# Altium PCB WPT Round 2.1 TX Layout.PcbDoc
Units mm, origin at the board's own origin, x right, y up, seen from the top; angles counter-clockwise.
Board outline 93.25 x 80 mm, 4 copper layers (Top Layer, Ground 1, Ground 2, Bottom Layer), stack 0.603 mm thick; 95 components, 39 nets, 228 pads, 190 vias.
Unrouted connection lines stored in the file: 4.
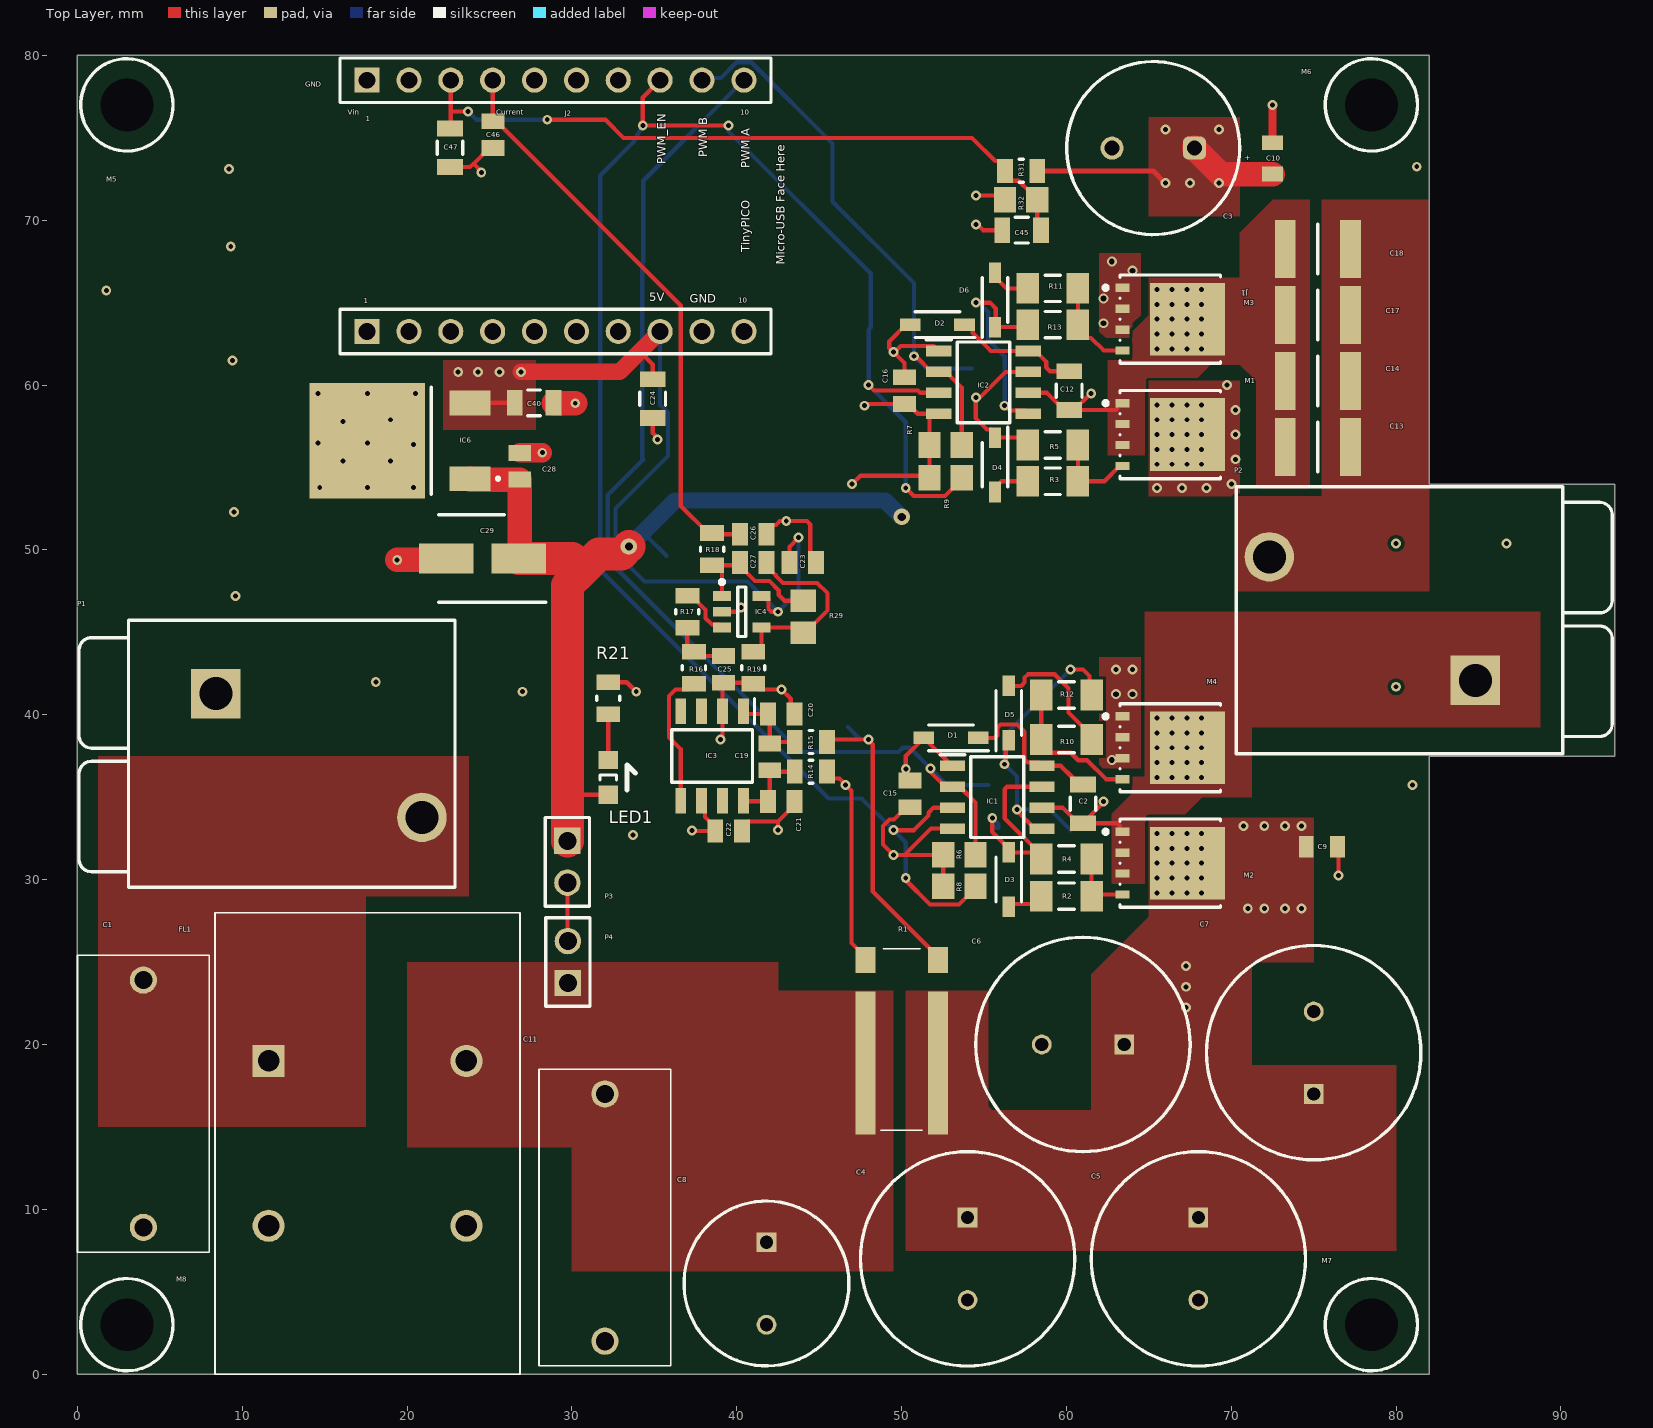
[diagram p0: Top Layer view]
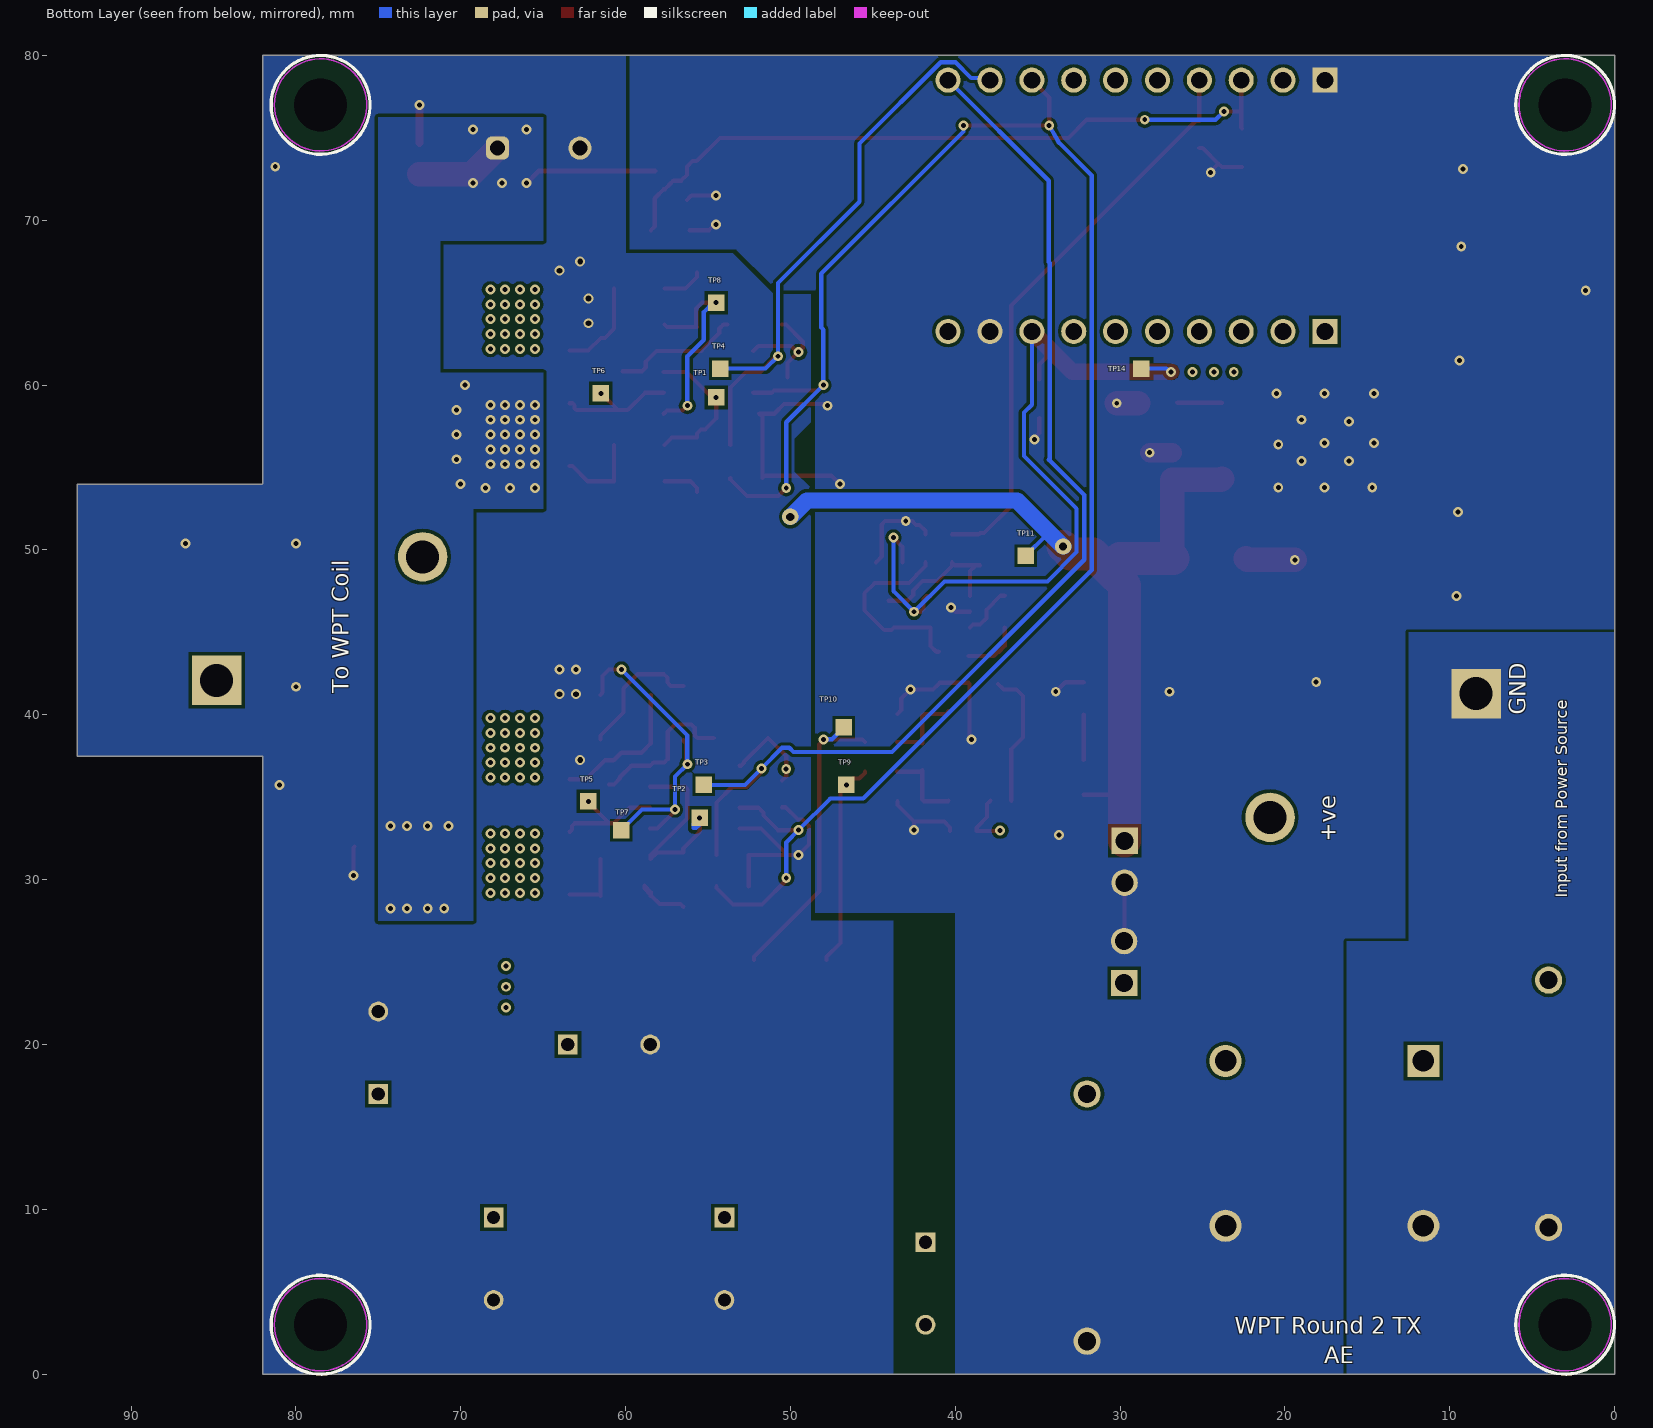
[diagram p1: Bottom Layer view, seen from below]
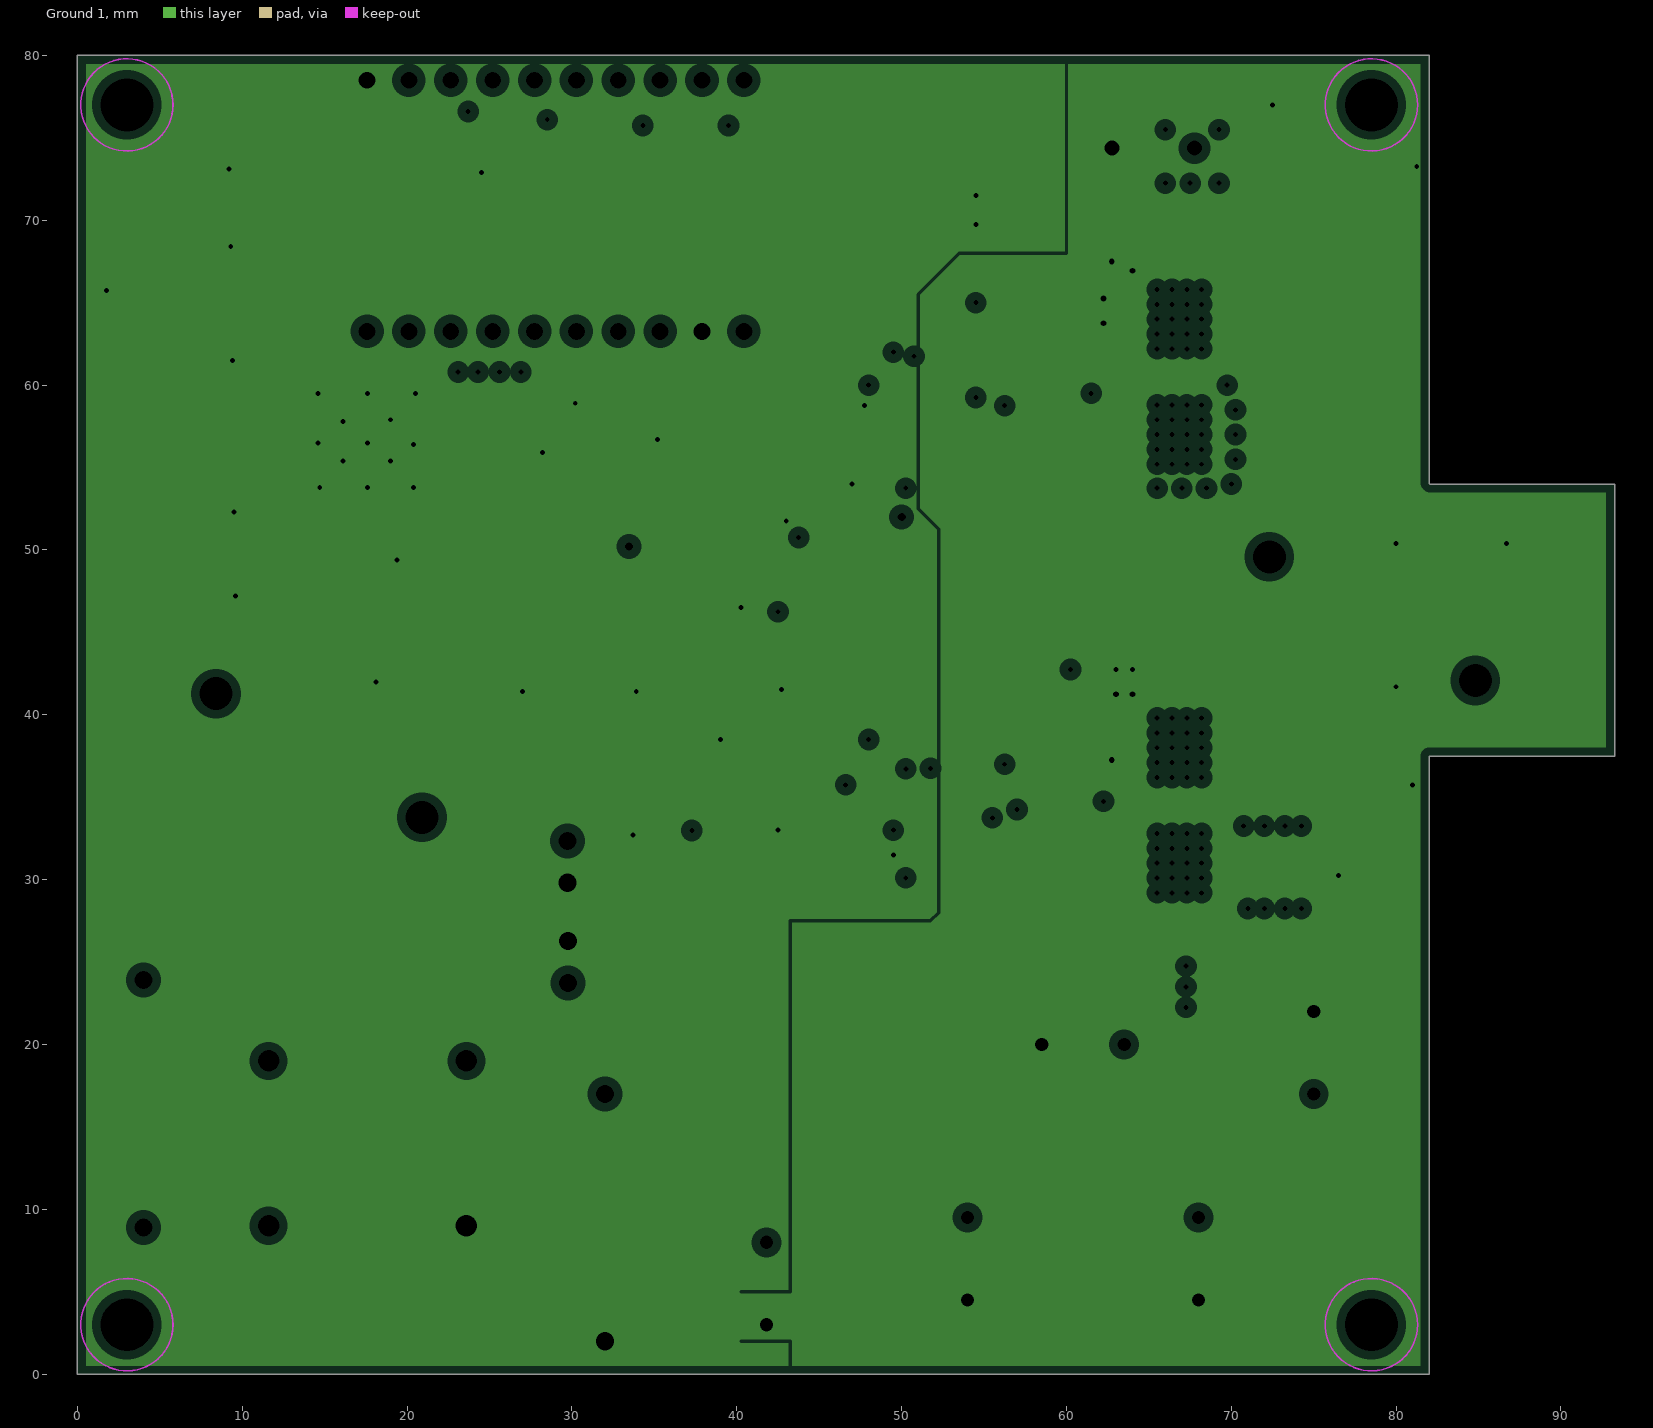
[diagram p2: Ground 1, clearances drawn from the general rule]
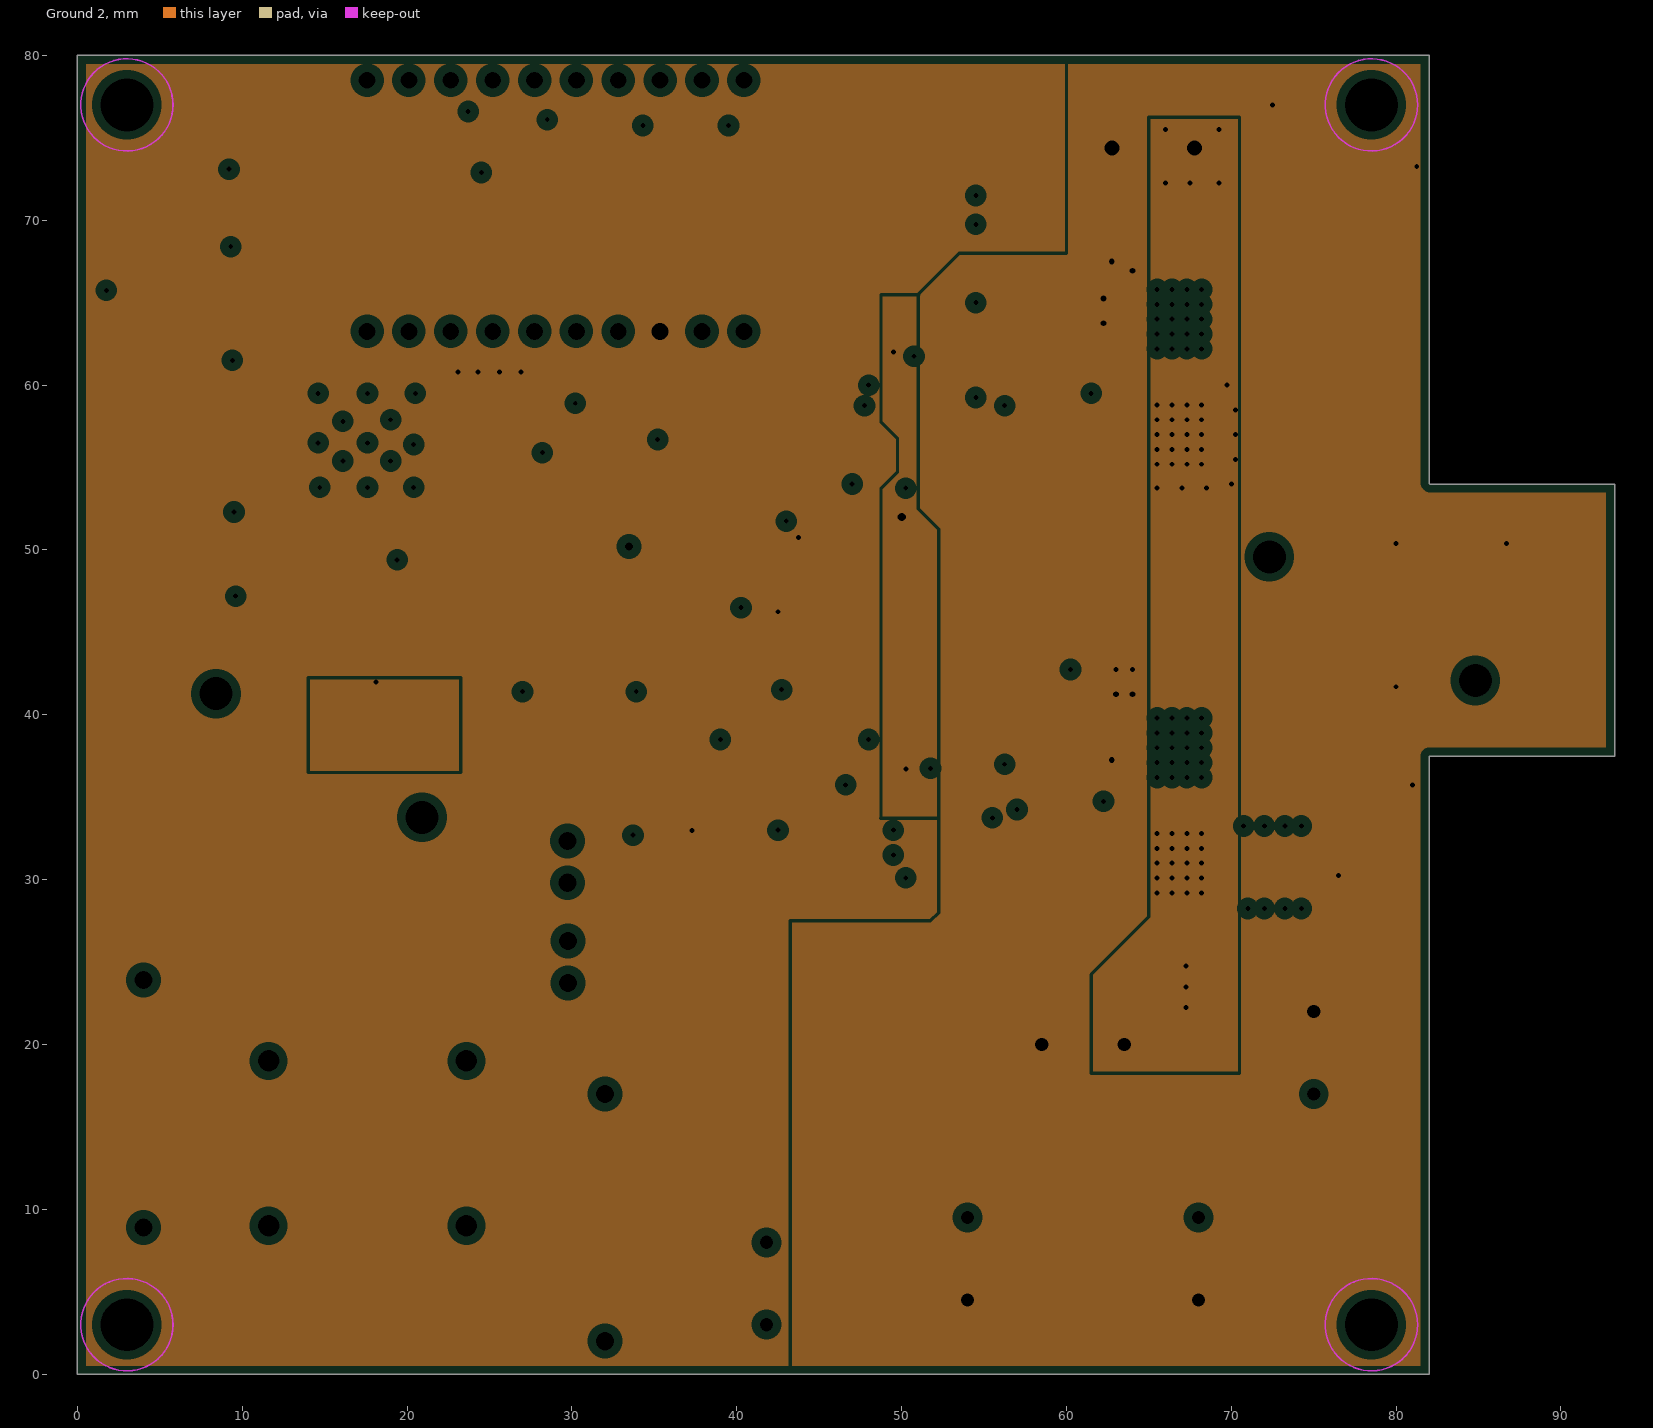
[diagram p3: Ground 2, clearances drawn from the general rule]
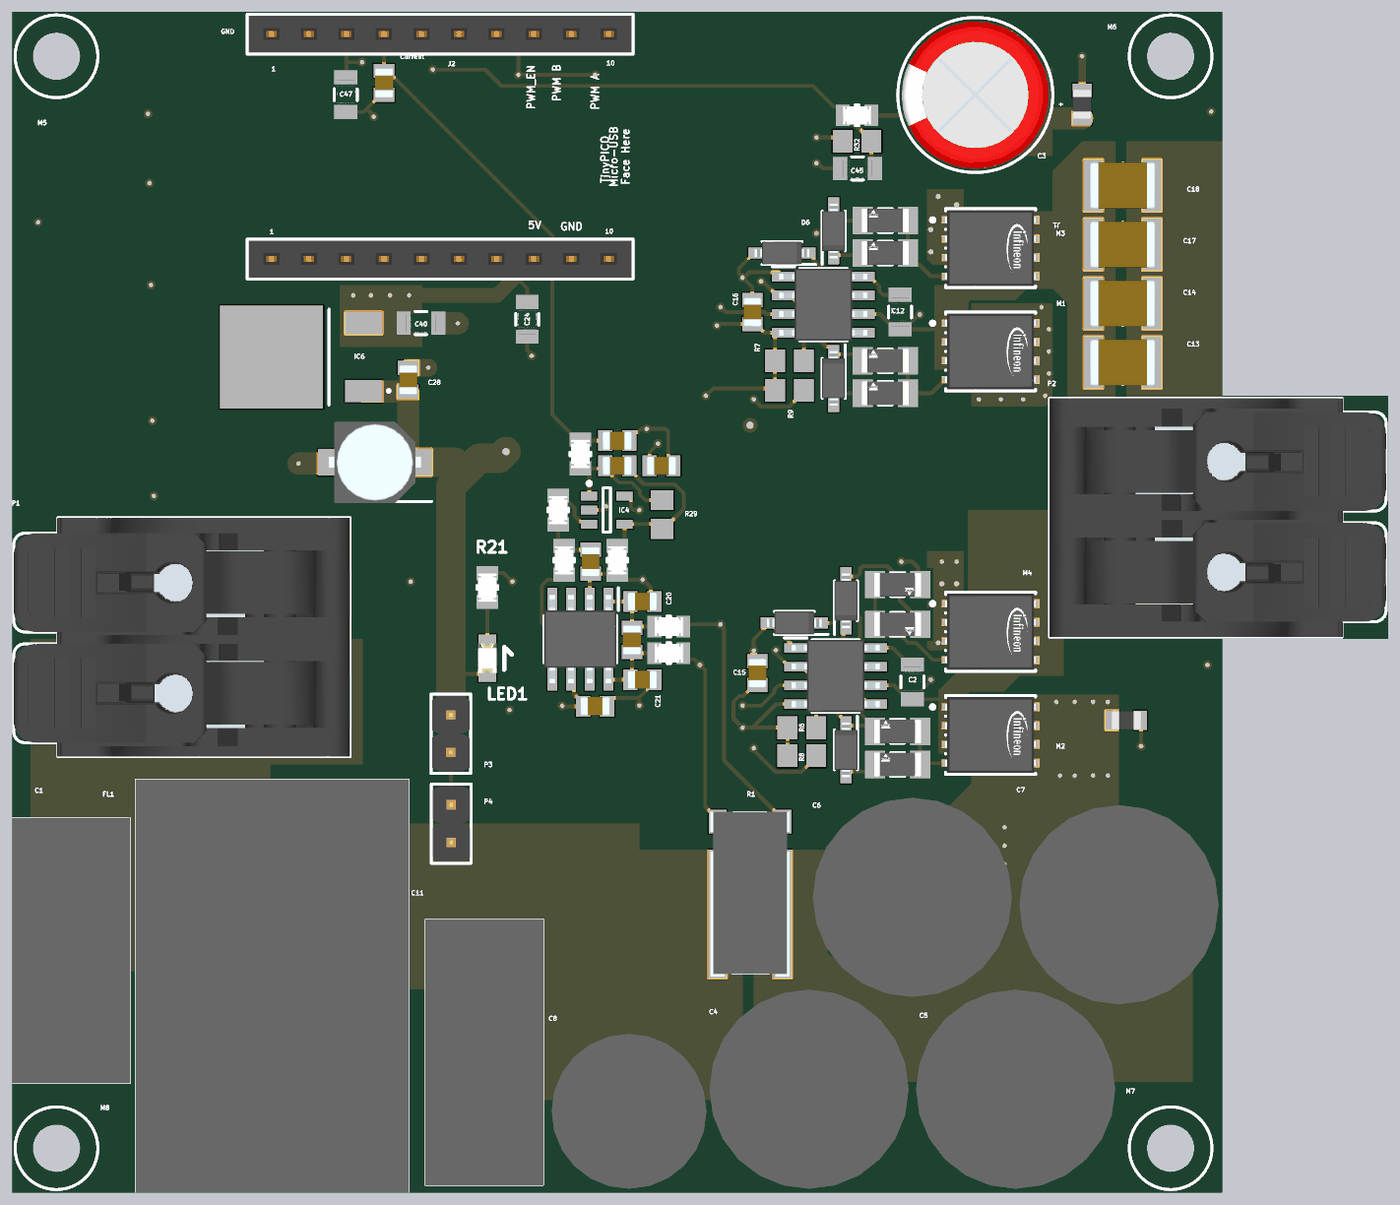
[diagram p4: 3D render of the assembled board from above, using the file's embedded part models]

## Layer stack, top to bottom
Top Solder: solder mask 0.0102, Solder Resist, Dk 3.5
Top Layer: signal copper 0.0356
Dielectric 2: prepreg 0.0711, PP-006, Dk 4.1
Ground 1: plane copper 0.035, net GND
Dielectric 1: dielectric 0.32, FR-4, Dk 4.8
Ground 2: plane copper 0.035, net (Multiple Nets)
Dielectric 3: prepreg 0.0711, PP-006, Dk 4.1
Bottom Layer: signal copper 0.0356
Bottom Solder: solder mask 0.0102, Solder Resist, Dk 3.5

## Board outline
82,54.045 82.045,54 93.25,54 93.25,37.5 82,37.5 82,0 0,0 0,80 82,80

## Design rules (kind name [scope] priority, off if disabled: settings)
Clearance [All] p1: gap=0.2 ignorepadtopadclearanceinfootprint=TRUE
Height [All] p1: minheight=-30 maxheight=50 prefheight=12.7
HoleSize [All] p1: absolutevalues=TRUE maxlimit=30 minlimit=0.025 maxpercent=80.000 minpercent=20.000
MinimumSolderMaskSliver [All] p1: minsoldermaskwidth=0.1
PlaneClearance [All] p1: clearance=0.508
PlaneConnect [All] p1: planeconnectstyle=Direct reliefexpansion=0.508 reliefentries=4 reliefconductorwidth=0.254 reliefairgap=0.254
PolygonConnect [All] p1: connectstyle=Direct reliefconductorwidth=0.254 reliefentries=4 polygonreliefangle="90 Angle" airgapwidth=0.254
RoutingVias [All] p1: holewidth=0.3 width=0.6 viastyle="Through Hole" minholewidth=0.3 minwidth=0.6 maxholewidth=0.711 maxwidth=1.27
SilkToSilkClearance [All] p1: silktosilkclearance=0
SilkToSolderMaskClearance [IsPad] p1: minsilkscreentomaskgap=0.1 clearancetoexposedcopper=TRUE
SolderMaskExpansion [All] p1: expansion=0.102 istentingtop=FALSE
Width "Power Input" [InNetClass('Power')] p1: maxlimit=10 minlimit=0.254 preferedwidth=1
Width "General Width" [All] p2: maxlimit=10 minlimit=0.254 preferedwidth=0.254
23 further rules are at their usual default settings.

## Components (designator, comment, footprint, x,y, rotation, side; value= is the part's Value field where it differs from the comment)
C1 "470nF/275V" 890324025039CS 4,8.904 r90 top
C2 "100nF/50V" "0805 Capacitor" 61,34.6 r90 top
C3 "220uF/63V" WCAP-ATUL_D10H16 65.266,74.379 r0 top
C4 "1000uF/50V" CAPPRD500W62D1300H2650 54,9.5 r270 top
C5 "1000uF/50V" CAPPRD500W62D1300H2650 68,9.5 r270 top
C6 "1000uF/50V" CAPPRD500W62D1300H2650 63.5,20 r180 top
C7 "1000uF/50V" CAPPRD500W62D1300H2650 75,17 r90 top
C8 "220uF/63VDC" CAPPRD500W62D1000H2650 41.8,8 r270 top
C9 "100nF, 100V" WCAP-CSGP_0805_H=1.25mm 75.5,32 r180 top
C10 "100nF, 100V" WCAP-CSGP_0805_H=1.25mm 72.5,73.75 r270 top
C11 "470nF/275V" 890324025039CS 32,2 r90 top
C12 "100nF/50V" "0805 Capacitor" 60.167,59.668 r90 top
C13 "100nF/250V" CAPC4532X220N 75.25,56.25 r180 top
C14 "100nF/250V" CAPC4532X220N 75.25,60.25 r180 top
C15 "1uF/50V" CAPC2012X135N 50.5,35.2 r90 top
C16 "1uF/50V" CAPC2012X135N 50.167,59.668 r90 top
C17 "100nF/250V" CAPC4532X220N 75.25,64.25 r180 top
C18 "100nF/250V" CAPC4532X220N 75.25,68.25 r180 top
C19 "1nF/50V" CAPC2012X90N 42,37.45 r270 top
C20 "1nF/50V" CAPC2012X90N 42.7,40.05 r180 top
C21 "1nF/50V" CAPC2012X90N 42.7,34.75 r180 top
C22 "100nF/50V" CAPC2012X90N 39.5,32.95 r180 top
C23 "100nF/50V" CAPC2012X90N 44,49.25 r180 top
C24 "10nF/50V" "0805 Capacitor" 34.9,59.178 r90 top
C25 "1nF/50V" CAPC2012X90N 39.2,42.75 r90 top
C26 "1nF/50V" CAPC2012X90N 41,50.95 r180 top
C27 "33pF/50V" CAPC2012X90N 41,49.25 r180 top
C28 "100nF/50V" CAPC2012X90N 26.835,55.075 r90 top
C29 "10uF/25V" CAPAE530X550N 24.575,49.484 r180 top
C40 "2.2uF/25V" "0805 Capacitor" 27.7,58.925 r0 top
C45 "10nF/50V" "0805 Capacitor" 57.284,69.4 r0 top
C46 "1nF/50V" CAPC2012X90N 25.2,75.2 r90 top
C47 "10nF/50V" "0805 Capacitor" 22.6,74.4 r90 top
D1 "Diode" SOD3716X135N 53,38.6 r180 top
D2 "Diode" SOD3716X135N 52.167,63.668 r180 top
D3 "Diode" SOD3716X135N 56.5,30 r270 top
D4 "Diode" SOD3716X135N 55.667,55.168 r270 top
D5 "Diode" SOD3716X135N 56.5,40.1 r90 top
D6 "Diode" SOD3716X135N 55.667,65.168 r90 top
FL1 "2 x 220uH 12A" 744844221 11.6,19 r270 top
IC1 "Gate Drive IC for TX" SOIC127P600X175-8N 55.8,35 r0 top
IC2 "Gate Drive IC for TX" SOIC127P600X175-8N 54.967,60.168 r0 top
IC3 "Amplifier" SOIC127P600X175-8N 38.5,37.5 r270 top
IC4 "Op-Amp" ADI-RJ-5_N 40.3,46.25 r0 top
IC6 "5V LDO Regulator" ROHM_TO-252-3 15.972,56.614 r90 top
J1 "61301011821" 61301011821 29,63.26 r0 top
J2 "61301011821" 61301011821 29,78.5 r0 top
LED1 "Green LED" 0805_A 32.2,36.2 r270 top
M1 "Mosfet" FP-PG-TDSON-8-MFG 66.3,57 r270 top
M2 "Mosfet" FP-PG-TDSON-8-MFG 66.3,31 r270 top
M3 "Mosfet" FP-PG-TDSON-8-MFG 66.3,64 r270 top
M4 "Mosfet" FP-PG-TDSON-8-MFG 66.3,38 r270 top
M5 "M3 Mounting Hole" "M3 HOLE" 3,77 r0 top
M6 "M3 Mounting Hole" "M3 HOLE" 78.5,77 r0 top
M7 "M3 Mounting Hole" "M3 HOLE" 78.5,3 r0 top
M8 "M3 Mounting Hole" "M3 HOLE" 3,3 r0 top
P1 "Power In" 691404910002B 11.5,37.629 r270 top
P2 "To Coil" 691404910002B 81.704,45.736 r90 top
P3 "61300211121" 61300211121 29.724,31.084 r270 top
P4 "61300211121" 61300211121 29.75,25 r90 top
R1 "0R005 5W" FC4L110R005FER 50,22 r0 top
R2 "4.7Ohm" FP-CRCW1206-e3-IPC_A 60,29 r180 top
R3 "4.7Ohm" FP-CRCW1206-e3-IPC_A 59.167,54.168 r180 top
R4 "10R" FP-CRCW1206-e3-IPC_A 60,31.25 r180 top
R5 "10R" FP-CRCW1206-e3-IPC_A 59.167,56.368 r180 top
R6 "10K" "0805 Resistor" 53.5,31.5 r0 top
R7 "10K" "0805 Resistor" 52.667,56.368 r0 top
R8 "10K" "0805 Resistor" 53.5,29.6 r0 top
R9 "10K" "0805 Resistor" 52.667,54.368 r0 top
R10 "4.7Ohm" FP-CRCW1206-e3-IPC_A 60,38.5 r0 top
R11 "4.7Ohm" FP-CRCW1206-e3-IPC_A 59.167,65.868 r180 top
R12 "10R" FP-CRCW1206-e3-IPC_A 60,41.2 r0 top
R13 "10R" FP-CRCW1206-e3-IPC_A 59.167,63.668 r180 top
R14 "470R" FP-CRCW0805-e3-MFG 44.5,36.55 r0 top
R15 "470R" FP-CRCW0805-e3-MFG 44.5,38.35 r0 top
R16 "1KR" FP-CRCW0805-e3-MFG 37.4,42.85 r270 top
R17 "6K8R" FP-CRCW0805-e3-MFG 37,46.25 r270 top
R18 "100R" FP-CRCW0805-e3-MFG 38.5,50.05 r270 top
R19 "10KR" FP-CRCW0805-e3-MFG 41,42.85 r270 top
R21 "1K0O" FP-CRCW0805-e3-MFG 32.2,41 r90 top
R29 "15K" "0805 Resistor" 44.044,45.946 r90 top
R31 "1M ohm" FP-CRCW0805-e3-MFG 57.25,73 r0 top
R32 "56K" "0805 Resistor" 57.25,71.239 r0 top
TP1 "TP" "Test Point" 54.5,59.25 r180 bottom
TP2 "TP" "Test Point" 55.5,33.75 r180 bottom
TP3 "TP" "Test Point" 55.25,35.75 r180 bottom
TP4 "TP" "Test Point" 54.25,61 r180 bottom
TP5 "TP" "Test Point" 62.25,34.75 r180 bottom
TP6 "TP" "Test Point" 61.5,59.5 r180 bottom
TP7 "TP" "Test Point" 60.25,33 r180 bottom
TP8 "TP" "Test Point" 54.5,65 r180 bottom
TP9 "TP" "Test Point" 46.601,35.75 r180 bottom
TP10 "TP" "Test Point" 46.75,39.25 r90 bottom
TP11 "TP" "Test Point" 35.725,49.65 r180 bottom
TP14 "TP" "Test Point" 28.7,61 r90 bottom

## Footprints (in the part's own frame and the unit in brackets; to place one, negate y for a bottom-side part, rotate by r counter-clockwise, add the part's x,y. Pads: shape width x height; smd on the part's side, far side on the other; paste and mask are expansions set on the pad)
"0805 Capacitor" [mm]
  rect 0.956x1.556 smd paste+0 mask+0: 1(-1.175,0) 2(1.175,0)
  silkscreen extent -0.4,-0.78 0.4,0.78, body extent -2.15,-1.28 2.15,1.28, height 0.25
"0805 Resistor" [mm] "Chip Resistor, 2-Leads, Body 2.00x1.25mm, IPC Low Density"
  rect 1.35x1.55 smd: 1(-0.975,0) 2(0.975,0)
  body extent -1.1,-0.72 1.1,0.72, height 0.7
0805_A [mm] "Chip LED, 2-Leads, Body 2.0x1.3mm, IPC Medium Density"
  rect 1.1x1.2 smd: 1(-1.05,0) 2(1.05,0)
  silkscreen extent -0.76,-0.5 0.76,1.65, body extent -1,-0.62 1,0.63, height 0.68
744844221 [mm]
  rect 1.95x1.95 hole 1.3: 2(0,0)
  round 1.95 hole 1.3: 4(10,0) 7(10,12) 9(0,12)
  silkscreen extent -9,-3.25 19,15.25, body extent -9,-3.25 19,15.25, height 33.1
61300211121 [mm] "Pin Header, pitch 2.54 mm, THT, Vertical, single row, 2p"
  rect 1.6x1.6 hole 1.1: 1(-1.27,0)
  round 1.6 hole 1.1: 2(1.27,0)
  silkscreen extent -2.69,-1.35 2.69,1.35, body extent -2.54,-1.27 2.54,1.27, height 8.57
61301011821 [mm] "Socket Header, Pitch 2.54 mm, THT, Vertical, single row, 10p"
  rect 1.52x1.52 hole 1.02: 1(-11.43,0)
  round 1.52 hole 1.02: 2(-8.89,0) 3(-6.35,0) 4(-3.81,0) 5(-1.27,0) 6(1.27,0) 7(3.81,0) 8(6.35,0) 9(8.89,0) 10(11.43,0)
  silkscreen extent -13.08,-1.35 13.08,1.35, body extent -12.95,-1.25 12.95,1.25, height 8.55
691404910002B [mm] "7.50 mm Screwless Clamp Power Connector, 2p"
  rect 3x3 hole 2: 1(-3.65,-3.1)
  round 3 hole 2: 2(3.85,9.4)
  silkscreen extent -8.1,-11.4 8.1,11.4, body extent -8.1,-11.4 8.1,11.4, height 24.16
890324025039CS [mm]
  round 1.65 hole 1.1: 1(0,0) 2(15,0)
  silkscreen extent -1.5,-4 16.5,4, body extent -1.5,-4 16.5,4, height 14.6
ADI-RJ-5_N [mm] "SOT-23, 5-Leads, Body 2.9x1.6mm, Pitch 0.95mm, IPC Medium Density"
  rect 1.1x0.6 smd: 1(-1.2,0.95) 2(-1.2,0) 3(-1.2,-0.95) 4(1.2,-0.95) 5(1.2,0.95)
  silkscreen extent -1.32,-1.5 0.25,1.92, body extent -0.85,-1.5 0.85,1.5, height 1.45
CAPAE530X550N [mm]
  rect 3.3x1.8 smd: 1(-2.2,0) 2(2.2,0)
  silkscreen extent -3.85,-2.65 2.65,2.65, body extent -3.13,-2.75 3.13,2.75, height 5.5
CAPC2012X90N [mm]
  rect 0.96x1.39 smd: 1(-0.81,0) 2(0.81,0)
  body extent -1,-0.63 1,0.63, height 0.9
CAPC2012X135N [mm]
  rect 0.96x1.39 smd: 1(-0.81,0) 2(0.81,0)
  body extent -1,-0.63 1,0.63, height 1.35
CAPC4532X220N [mm]
  rect 1.25x3.52 smd: 1(-1.98,0) 2(1.98,0)
  silkscreen extent 0,-1.5 0,1.5, body extent -2.25,-1.6 2.25,1.6, height 2.2
CAPPRD500W62D1000H2650 [mm]
  rect 1.2x1.2 hole 0.8: 1(0,0)
  round 1.2 hole 0.8: 2(5,0)
  silkscreen extent -2.5,-5 7.5,5, body extent -2.75,-5.25 7.75,5.25, height 26.5
CAPPRD500W62D1300H2650 [mm]
  rect 1.2x1.2 hole 0.8: 1(0,0)
  round 1.2 hole 0.8: 2(5,0)
  silkscreen extent -4,-6.5 9,6.5, body extent -4.25,-6.75 9.25,6.75, height 26.5
FC4L110R005FER [mm]
  rect 1.2x8.7 smd: 1(-2.2,-3.125) 2(2.2,-3.125)
  rect 1.2x1.6 smd: 3(2.2,3.125) 4(-2.2,3.125)
  silkscreen extent -1.25,-7.2 1.25,3.8, body extent -2.68,-7.35 2.68,3.8, height 0.8
FP-CRCW0805-e3-MFG [mm]
  rect 0.95x1.45 smd paste+0 mask+0: 1(-0.975,0) 2(0.975,0)
  silkscreen extent -0.13,-0.7 0.13,0.7, body extent -1.55,-0.82 1.55,0.82, height 0.25
FP-CRCW1206-e3-IPC_A [mm]
  rect 1.356x1.858 smd paste+0 mask+0: 1(-1.526,0) 2(1.526,0)
  silkscreen extent -0.47,-0.8 0.47,0.8, body extent -2.7,-1.43 2.7,1.43, height 0.25
FP-PG-TDSON-8-MFG [mm]
  rect 0.5x0.85 smd paste-1000 mask+0: 1(-1.905,-2.9) 2(-0.635,-2.9) 3(0.635,-2.9) 4(1.905,-2.9)
  rect 4.41x4.55 smd paste-1000 mask-1000: 5-6-7-8(0,1.05)
  silkscreen extent -2.68,-4.05 2.68,3.05, body extent -2.99,-3.43 3,3.42, height 0.25
"M3 HOLE" [mm]
  round 0 hole 3.2 unplated mask+0.1: 1(0,0)
  Keep-Out Layer circle w0.1: c0,0 r2.8
  silkscreen extent -2.8,-2.8 2.8,2.8
ROHM_TO-252-3 [mm]
  rect 1.5x2.5 smd: 1(-2.3,-7.85) 2(2.3,-7.85)
  rect 7x7 smd: 3(0,-1.6)
  silkscreen extent -3.25,-9.63 3.25,-5.5
SOD3716X135N [mm]
  rect 1.25x0.75 smd: 1(-1.65,0) 2(1.65,0)
  silkscreen extent -2.27,-0.77 1.35,0.77, body extent -1.85,-0.77 1.85,0.77, height 1.35
SOIC127P600X175-8N [mm]
  rect 1.525x0.65 smd: 1(-2.712,1.905) 2(-2.712,0.635) 3(-2.712,-0.635) 4(-2.712,-1.905) 5(2.712,-1.905) 6(2.712,-0.635) 7(2.712,0.635) 8(2.712,1.905)
  silkscreen extent -3.47,-2.45 1.6,2.58, body extent -3,-2.45 3,2.45, height 1.75
"Test Point" [mm]
  rect 1x1 smd: 1(0,0)
WCAP-ATUL_D10H16 [mm] "Aluminum Electrolytic Capacitors, 10x16mm"
  rrect50% 1.4x1.4 hole 0.9: 1(2.5,0)
  round 1.4 hole 0.9: 2(-2.5,0)
  silkscreen extent -5.25,-5.25 5.25,5.25, body extent -4.99,-5 5,5, height 16.31
WCAP-CSGP_0805_H=1.25mm [mm] "Ceramic Capacitors, body 2x1.25mm"
  rect 0.9x1.3 smd: 1(-0.95,0) 2(0.95,0)
  body extent -1,-0.62 1,0.63, height 1.25

## Part data
C1 C11: library part 890324025039CS, "Safety Capacitor, 470nF/275V", Manufacturer_Name="Wurth Elektronik", Height=14.5mm, Manufacturer_Part_Number=890324025039CS
C2 C12: library part 885012207098, Supplier Part Number 1=710-885012207098, Supplier 1=Mouser
C3: library part 860020775019, "WCAP-ATUL Aluminum Electrolytic Capacitor, Radial, THT, D10xH16mm, 220uF/63V", Capacitance=220uF, Capacitance Tolerance=+/-20%, Leakage Current=820uA, Manufacturer="Wurth Elektronik", Manufacturer Part Number=860040881014, Operating Temperature="-40 to +105degC", Rated Voltage=63VDC, Ripple Current=375mA, Supplier Part Number 1=710-860020775019, ComponentLink1Description=Manufacturer, ComponentLink1URL=http://www.we-online.de, ComponentLink2Description=Datasheet, ComponentLink2URL=https://www.we-online.com/catalog/datasheet/860040881014.pdf, Diameter=18mm, Dissipation Factor=9%, Endurance=10000h, Height=41mm, Mounting Technology=THT, Packaging="Ammo Pack", Published Date="October 2020", Supplier 1=Mouser, Technical Reference=ATDL410821M100DSPS1K000
C4 C5 C6 C7: library part ESH108M050AL4AA, "Capacitor 1000uF", Supplier Part Number 1=80-ESH108M050AL4AA, Supplier 1=Mouser
C8: library part 860040775010, "Polarised Cap, 220uF/63VDC", Manufacturer_Name="Wurth Elektronik", Datasheet Link=https://www.mouser.de/datasheet/2/445/860040775010-1725627.pdf, Height=26.5mm, Manufacturer_Part_Number=860040775010
C9 C10: library part 885012207128, "WCAP-CSGP Multilayer Ceramic Chip Capacitor, General Purpose, size 0805, X7R, 100nF, 100V", Capacitance=100nF, Capacitance Tolerance=+/-10%, Isolation Resistance=>=1GOhm, Manufacturer="Wurth Elektronik", Operating Temperature="-55 to +125degC", Rated Voltage=100VDC, Ceramic Type=X7R, ComponentLink1Description=Manufacturer, ComponentLink1URL=http://www.we-online.de, ComponentLink2Description=Datasheet, ComponentLink2URL=https://www.we-online.com/catalog/datasheet/885012207128.pdf, Dissipation Factor=#NAME?, Height=1.25mm, Manufacturer Part Number=885012207128, Mounting Technology=SMT, Packaging="Tape and Reel", Published Date="May 2020", Size=0805, Technical Reference=X7R0805104K100DFCT10000
C13 C14 C17 C18: library part C1812C104JAGACAUTO, Manufacturer_Name=Kemet, Supplier Part Number 1=80-C1812C104JAGAUTO, Datasheet Link=https://api.kemet.com/component-edge/download/datasheet/C1812C104JAGACAUTO.pdf, Height=2.2mm, Manufacturer_Part_Number=C1812C104JAGACAUTO, Supplier 1=Mouser
C15 C16: library part 885012207103, "Capacitor 1uF/50V", Manufacturer_Name="Wurth Elektronik", Supplier Part Number 1=710-885012207103, Datasheet Link=https://katalog.we-online.com/pbs/datasheet/885012207103.pdf, Height=1.35mm, Manufacturer_Part_Number=885012207103, Supplier 1=Mouser
C19 C20 C21 C25 C26 C46: library part 885012207086, Manufacturer_Name="Wurth Elektronik", Supplier Part Number 1=710-885012207086, Datasheet Link=https://katalog.we-online.com/pbs/datasheet/885012207086.pdf, Height=0.9mm, Manufacturer_Part_Number=885012207086, Supplier 1=Mouser
C22 C23 C28: library part 885012207098, Manufacturer_Name="Wurth Elektronik", Supplier Part Number 1=710-885012207098, Height=0.9mm, Supplier 1=Mouser
C24 C45 C47: library part 885012207092, Supplier Part Number 1=710-885012207092, Supplier 1=Mouser
C27: library part C0805C330J5GACTU, "Capacitor 33pF/50V", Manufacturer_Name=Kemet, Supplier Part Number 1=80-C0805C330J5G, Manufacturer_Part_Number=C0805C330J5GACTU, Supplier 1=Mouser
C29: library part 865060440001, "Capacitor Polarised 10uF/25V", Manufacturer_Name="Wurth Elektronik", Datasheet Link=http://katalog.we-online.com/pbs/datasheet/865060440001.pdf, Height=5.5mm, Manufacturer_Part_Number=865060440001
C40: library part 885012207079, Capacitance=2.2, Case Code (Imperial)=0805, Case Code (Metric)=2012, Dielectric=X5R, Max Operating Temperature=125°C, Package Quantity=2000, Supplier Part Number 1=710-885012207079, Voltage Rating (DC)=25V, Case/Package=0805, Supplier 1=Mouser
D1 D2 D3 D4 D5 D6: library part 1N4148W-E3-08, Manufacturer_Name=Vishay, Mouser2 Part Number=78-1N4148W-E3-08, Supplier Part Number 1=1N4148W-E3-08CT-ND, Datasheet Link=https://componentsearchengine.com//1N4148W-E3-08.pdf, Height=1.35mm, Manufacturer_Part_Number=1N4148W-E3-08, Mouser2 Price/Stock=https://www.mouser.com/Search/Refine.aspx?Keyword=78-1N4148W-E3-08, Supplier 1=Digi-Key
FL1: library part 744844221, "Common Mode Choke 220uH 12A", Manufacturer_Name="Wurth Elektronik", Height=33mm, Manufacturer_Part_Number=744844221
IC1 IC2: library part IRS2008SPBF, "Gate Drive IC", Manufacturer_Name=Infineon, Supplier Part Number 1=726-IRS2008SPBF, Height=1.75mm, Manufacturer_Part_Number=IRS2008SPBF, Supplier 1=Mouser
IC3: library part AD8215YRZ, "Integrated Circuit Amplifier", Manufacturer_Name="Analog Devices", Supplier Part Number 1=584-AD8215YRZ, Datasheet Link=http://www.analog.com/static/imported-files/data_sheets/AD8215.pdf, Height=1.75mm, Manufacturer_Part_Number=AD8215YRZ, Supplier 1=Mouser
IC4: library part AD8031ARTZ-REEL7, "Single Channel RRIO Operational Amplifier, 80 MHz BW, 35 V/us SR, Industrial, 5-pin SOT23 (RJ-5), Reel", Amplifiers Per Package=1, Generic Part Number=AD8031, Input Bias Current=450nA, Input Offset Voltage=1mV, Manufacturer="Analog Devices", Supplier Part Number 1=584-AD8031ARTZ-R7, Code_JEDEC=MO-178-AA, ComponentLink1Description="Manufacturer URL", ComponentLink1URL=http://www.analog.com/en/index.html, ComponentLink2Description=Datasheet, ComponentLink2URL=http://www.analog.com/static/imported-files/data_sheets/AD8031_8032.pdf, ComponentLink3Description="Package Specification", ComponentLink3URL=http://www.analog.com/static/imported-files/packages/PKG_PDF/SOT-23(RJ)/RJ_5.pdf, ComponentLink4Description="Reference Circuit", ComponentLink4URL=http://www.analog.com/en/all-operational-amplifiers-op-amps/operational-amplifiers-op-amps/ad8031/products/product.html#product-recommendations, DatasheetVersion="Rev. D", Iq/Amp=900uA, Mounting Technology="Surface Mount", PackageDescription="5-Pin Small Outline Transistor Package, Body 2.9 x 1.6 mm, Pitch 0.95 mm", PackageReference=RJ-5, PackageVersion=121608-A, Packing=Reel, PartNumber=AD8031ARTZ-REEL7, RevisionNote="Reference Circuit URL fixed", Slew Rate=35V/us, Small Signal Bandwidth=80MHz, Supplier 1=Mouser, V Span Max=12V, V Span Min=2.7V
IC6: library part BD450M5FP-CE2, Manufacturer_Name="ROHM Semiconductor", Mouser2 Part Number=755-BD450M5FP-CE2, Datasheet Link=https://componentsearchengine.com//BD450M5FP-CE2.pdf, Manufacturer_Part_Number=BD450M5FP-CE2, Mouser2 Price/Stock=https://www.mouser.com/Search/Refine.aspx?Keyword=755-BD450M5FP-CE2
J1 J2: "WR-PHD Socket Header, THT, pitch 2.54mm, Single Row, Vertical, 10p", Contact Resistance=20mOhm, Manufacturer="Wurth Elektronik", Operating Temperature="-40 to +125degC", Rated Current=3A, Withstanding Voltage=500VAC, Working Voltage=250VAC, ComponentLink1Description=Manufacturer, ComponentLink1URL=http://www.we-online.de, ComponentLink2Description=Datasheet, ComponentLink2URL=https://www.we-online.com/catalog/datasheet/61301011821.pdf, Gender="Socket Header", Manufacturer Part Number=61301011821, Mounting Technology=THT, Orientation=Vertical, Packaging=Tray, Pin Number=10, Pitch=2.54mm, Published Date="May 2020", Row Number=Single
LED1: library part 150080GS75000, "SMD mono-color Chip LED, WL-SMCW, Green", Color=Green, Manufacturer="Wuerth Elektronik", Supplier Part Number 1=710-150080GS75000, ComponentLink1Description="Manufacturer URL", ComponentLink1URL=http://www.we-online.com, ComponentLink2Description=Datasheet, ComponentLink2URL=http://katalog.we-online.com/led/datasheet/150080GS75000.pdf, PackageReference=0805_A, PartNumber=150080GS75000, Supplier 1=Mouser
M1 M2 M3 M4: library part BSC040N10NS5ATMA1, "MOSFET N-CH 100V 100A 8TDSON / Mosfet Switcher", Continuous Drain Current=100A, Drain To Source Breakdown Voltage=100V, Drain To Source Resistance=3.4mΩ, Gate To Source Voltage=20V, Input Capacitace At Vds="4100pF @ 50V", Manufacturer=Infineon, Max Forward Diode Voltage=1.1V, Max Junction Temp=+150°C, Package=PG-TDSON-8, Power Dissipation=139W, Pulse Drain Current=400A, Supplier Part Number 1=726-BSC040N10NS5ATMA, Temperature="-55°C to +150°C", Temperature Range Low=-55°C, Typ Forward Diode Voltage=0.9V, Automotive=No, Category=Trans, ComponentLink2Description=Datasheet, ComponentLink2URL=https://www.infineon.com/dgdl/Infineon-BSC040N10NS5-DS-v02_02-EN.pdf?fileId=5546d4624a0bf290014a0fbcee2e6b38, Depletion Mode=False, Device Class L1="Discrete Semiconductors", Device Class L2=Transistors, Device Class L3=MOSFETs, Digikey Description="MOSFET N-CH 100V 100A 8TDSON", Drain To Source Voltage=100V, Footprint Url=https://www.infineon.com/dgdl/Infineon-PG-TDSON-8-7-FP-v01_00-EN.pdf?fileId=5546d46259d9a4bf015a1b6adadd1f0a, Gate Charge At Vgs="58nC @ 10V", Height=1.1mm, Lead Free=Yes, Manufacturer Part Number=BSC040N10NS5ATMA1, Mouser Description="MOSFET N-Ch 100V 100A TDSON-8", Number Of Channels=1, Number Of N Channels=1, Octopart=https://octopart.com/bsc040n10ns5atma1-infineon-52825711, Reverse Recovery Charge=90nC, Reverse Recovery Time=54ns, RoHS=TRUE, Rthja Max=50K/W, Supplier 1=Mouser, Temperature Range High=+150°C, Threshold Vgs Max=3.8V, Threshold Vgs Min=2.2V, Transconductance=120S, Turn Off Delay Time=32ns, Turn On Delay Time=13ns
M5 M6 M7 M8: library part M3_Mounting_hole
P1 P2: library part 691404910002B, "Serie 4049 B - 7.50mm Screwless Clamp Power Connector WR-TBL, 2 pin", Manufacturer="Wurth Elektronik", Operating Temperature=-40to105degC, Supplier Part Number 1=710-691404910002B, Datasheet URL=http://katalog.we-online.de/em/datasheet/6914049100xxB.pdf, Manufacturer URL=http://www.we-online.de, Mounting Technology=THT, Package Reference=691404910002B, Packaging=Box, Part Number=691404910002B, Pin Number=2, Pitch=7.50mm, Publisher=WurthElektronik, Supplier 1=Mouser
P3 P4: "WR-PHD Pin Header, THT, pitch 2.54mm, Single Row, Vertical, 2p", Contact Resistance=20mOhm, Manufacturer="Wurth Elektronik", Operating Temperature="-40 to +105degC", Rated Current=3A, Withstanding Voltage=500VAC, Working Voltage=250VAC, ComponentLink1Description=Manufacturer, ComponentLink1URL=http://www.we-online.de, ComponentLink2Description=Datasheet, ComponentLink2URL=https://www.we-online.com/catalog/datasheet/61300211121.pdf, Gender="Pin Header", Manufacturer Part Number=61300211121, Mounting Technology=THT, Orientation=Vertical, Packaging=Bag, Pin Number=2, Pitch=2.54mm, Published Date="May 2020", Row Number=Single
R1: library part FC4L110R005FER, "Resistor 0R005 5W", Manufacturer_Name=Ohmite, Supplier Part Number 1=588-FC4L110R005FER, Height=0.7mm, Manufacturer_Part_Number=FC4L110R005FER, Supplier 1=Mouser
R2 R3 R10 R11: library part CRCW12064R70FKEA, "RES Thick Film, 4.7Ω, 1%, 0.25W, 100ppm/°C, 1206 / MOSFET Gate Fast-off Resistor 4.7Ohm", Case Code (Imperial)=1206, Case Code (Metric)=3216, Max Operating Temperature=155°C, Max Power Dissipation=250mW, Min Operating Temperature=-55°C, Package Quantity=10, Resistance=4.7R, Supplier Part Number 1=71-CRCW12064R70FKEA, Temperature Coefficient=100ppm/°C, Tolerance=1%, Voltage Rating=200V, Case/Package=1206, Composition="Thick Film", Contact Plating=Tin, Depth=1.6mm, Features="Automotive AEC-Q200", Height=0.024inch, Length=3.2mm, Military Standard=Not, Mount="Surface Mount", Number of Pins=2, Number of Terminations=2, Packaging="Tape and Reel", Power Rating=250mW, Radiation Hardening=No, Supplier 1=Mouser, Weight=0.000353oz, Width=0.063inch
R4 R5 R12 R13: library part CRCW120610R0FKEA, "RES Thick Film, 10Ω, 1%, 0.25W, 100ppm/°C, 1206 / MOSFET Gate Resistor 10Ohm", Case Code (Imperial)=1206, Case Code (Metric)=3216, Max Operating Temperature=155°C, Max Power Dissipation=250mW, Min Operating Temperature=-55°C, Package Quantity=10, Supplier Part Number 1=541-10.0FDKR-ND, Temperature Coefficient=100ppm/°C, Tolerance=1%, Voltage Rating=200V, Case/Package=1206, Composition="Thick Film", Contact Plating=Tin, Depth=1.6mm, Features="Automotive AEC-Q200", Height=0.55mm, Lead Free="Lead Free", Length=3.2mm, Military Standard=Not, Number of Pins=2, Number of Terminations=2, Packaging="Tape and Reel", Power Rating=250mW, Radiation Hardening=No, Resistance=10R, Supplier 1=Digi-Key, Termination=SMD/SMT, Voltage Rating (DC)=200V, Weight=0.000353oz, Width=0.063inch
R6 R7 R8 R9: library part CRCW080510K0FKEB, "High Presicion 10K Ohm", Supplier Part Number 1=26R4046, Supplier 1=Newark
R14 R15: library part CRCW0805470RFKEB, "Resistor 470 Ohm", Supplier Part Number 1=71-CRCW0805470RFKEB, Number of Terminations=2, Supplier 1=Mouser
R16: library part CRCW08051K00FKEA, "Resistor 1k Ohm", Supplier Part Number 1=71-CRCW0805-1.0K-E3, Number of Terminations=2, Supplier 1=Mouser
R17: library part CRCW08056K80FKEA, "Resistor 6.8K Ohm", Supplier Part Number 1=71-CRCW0805-6.8K-E3, Number of Terminations=2, Supplier 1=Mouser
R18: library part CRCW0805100RFKEB, "Resistor 100 Ohm", Supplier Part Number 1=71-CRCW0805100RFKEB, Number of Terminations=2, Supplier 1=Mouser
R19: library part CRCW080510K0FKEA, "Resistor 10K Ohm", Supplier Part Number 1=71-CRCW0805-10K-E3, Number of Terminations=2, Supplier 1=Mouser
R21: library part CRCW08051K00FKEAC, "Resistor 1K0 Ohm", Supplier Part Number 1=71-CRCW0805-1.0K-E3, Number of Terminations=2, Supplier 1=Mouser
R29: library part ERA-6AED153V, "15K Ohm Resistor", Supplier Part Number 1=667-ERA-6AED153V, Supplier 1=Mouser
R31: library part CRCW08051M00FKEA, "RES Thick Film, 1MΩ, 1%, 0.125W, 100ppm/°C, 0805 / 1M Ohm Resistor", Case Code (Imperial)=0805, Case Code (Metric)=2012, Max Operating Temperature=155°C, Min Operating Temperature=-55°C, Package Quantity=5000, Power Rating=125mW, Resistance=1MR, Supplier Part Number 1=71-CRCW08051M00FKEAH, Temperature Coefficient=100ppm/°C, Tolerance=1%, Voltage Rating=150V, Case/Package=0805, Composition="Thick Film", Contact Plating=Tin, Depth=1.25mm, Height=0.45mm, Lead Free="Lead Free", Length=2mm, Military Standard=Not, Mount="Surface Mount", Number of Pins=2, Packaging="Tape and Reel", Radiation Hardening=No, Supplier 1=Mouser, Termination=SMD/SMT, Voltage Rating (DC)=150V, Weight=0.000194oz, Width=1.25mm
R32: library part ERJ-6ENF5622V, "56K Ohm Resistor", Supplier Part Number 1=667-ERJ-6ENF5622V, Supplier 1=Mouser
TP1 TP2 TP3 TP4 TP5 TP6 TP7 TP8 TP9 TP10 TP11 TP14: library part "Test Point", "Test Point 1mm by 1mm"

## Via types
v1: diameter 0.6, hole 0.3, Top Layer to Bottom Layer, 181 vias
v2: diameter 0.6, hole 0.35, Top Layer to Bottom Layer, 7 vias
v3: diameter 1, hole 0.5, Top Layer to Bottom Layer, 2 vias

## Nets (pads, with @x,y where several pads share a name; then routed paths per layer and width w, separated by ;. In a path a pad name is that pad's centre, name@x,y a point inside that pad or via, vN(x,y) a via of type N, cw(c..) or ccw(c..) an arc to the next point about the centre after c; other vN are vias at no path point)
5V: C22.2 C23.2 C24.2 C40.1 IC3.6 IC4.5 IC6.2 J1.8 TP14.1 | length 54.5
  Top Layer w0.254: IC6.2 23.832,58.925 C40.1 ; 34.12,62.03 34.9,61.25 C24.2 ; v1@37.25,33 37.3,32.95 C22.2 38.69,33.165 38.063,33.792 38.063,34.59 IC3.6 ; IC4.5 41.75,47.2 41.923,47.027 41.923,46.421 42.094,46.25 v1(42.5,46.25) ; C23.2 43.19,50.19 v1(43.75,50.75)
  Top Layer w1: v1(26.9,60.8) 32.89,60.8 34.12,62.03 J1.8
  Bottom Layer w0.254: v1(26.9,60.8) 26.994,60.8 27.194,61 TP14.1 ; J1.8 35.35,58.811 35.827,58.334 35.827,55.698 32.633,52.503 32.633,49.867 34.408,48.092 40.658,48.092 v1(42.5,46.25) 43.75,47.5 v1(43.75,50.75)
  other v1: 37.275,32.975 23.1,60.8 24.3,60.8 25.6,60.8
12V: C15.2 C16.2 C28.1 C29.1 D1.2 D2.2 IC1.1 IC2.1 IC6.1 LED1.2 P3.1 TP11.1 | length 67.8
  Top Layer w0.254: 29.724,35.1 29.774,35.15 LED1.2 ; C16.2 50.167,61.333 v1(49.5,62) ; v1@50.25,36.72 50.25,37.5 D1.2 52.826,37.124 52.826,37.08 53.001,36.905 IC1.1 ; v1(50.251,36.72) 50.251,36.259 C15.2 ; D2.2 50.267,63.668 49.25,62.651 49.25,62.25 v1(49.5,62) ; IC2.1 51.95,62.377 49.949,62.377 49.572,62 v1(49.5,62)
  Top Layer w1.5: IC6.1 23.871,54.265 C28.1 C29.1@26.835,49.544
  Top Layer w2: C29.1@26.835,49.544 C29.1 29.991,49.484 30.678,48.796 ; P3.1 29.724,35.1 29.724,47.843 30.678,48.796 ; v3(33.46,50.21) 33,49.75 31.632,49.75 30.678,48.796
  Bottom Layer w0.254: 34.163,50.913 34.462,50.913 TP11.1
  Bottom Layer w1: v3(33.46,50.21) 34.163,50.913 36.25,53 49,53 v3(50,52)
Amp_out: IC3.5 R16.2 | length 8.5
  Top Layer w0.254: IC3.5 36.595,37.925 35.889,38.631 35.889,41.132 36.284,41.527 37.052,41.527 R16.2
"Current ADC Output": C26.2 C46.2 J2.4 R18.1 | length 35
  Top Layer w0.254: J2.4 25.19,76.02 25.405,76.02 36.6,64.825 36.6,52.675 38.25,51.025 R18.1 38.575,50.95 C26.2
"DCDC Input Unfiltered": C8.1 C11.2 FL1.9 P4.1 R1.1
GND: C3.2 C4.2 C5.2 C6.2 C7.2 C8.2 C9.1 C10.1 C11.1 C15.1 C16.1 C20.1 C21.1 C22.1 C23.1 C24.1 C25.1 C26.1 C28.2 C29.2 C40.2 C45.1 C46.1 C47.1 FL1.7 IC1.4 IC2.4 IC3.2 IC4.2 IC6.3 J1.9 J2.1 M3.1 M3.2 M3.3 M4.1 M4.2 M4.3 P3.2 P4.2 R6.1 R7.1 R8.1 R9.1 R19.2 R21.2 R32.1 | length 70.8
  Top Layer w0.254: C47.1 23.82,73.225 24.048,73.452 ; v1(24.5,72.9) 24.5,72.958 24.048,73.411 24.048,73.452 ; C46.1 24.985,74.39 24.048,73.452 ; C28.2 C28.2@26.85,55.9 ; C40.2 C40.2@28.9,58.9 ; P3.2 29.737,29.801 29.737,26.283 P4.2 ; R21.2 33.325,41.975 v1(33.9,41.4) ; C24.1 34.9,57.094 35.2,56.794 v1(35.2,56.7) ; v1(39,38.5) 39.135,38.635 IC3.2 39.135,41.875 C25.1 40.935,41.94 R19.2 41.348,41.527 v1(42.723,41.527) 43.273,40.977 43.273,40.287 C20.1 ; IC4.2 40,46.25 v1(40.25,46.5) ; C22.1 40.31,33.165 40.663,33.518 42.493,33.518 ; C26.1 41.81,51.165 42.163,51.518 42.378,51.518 42.61,51.75 44.25,51.75 44.457,51.543 44.457,49.603 C23.1 ; v1(42.5,33) 42.493,33.007 42.493,33.518 ; C21.1 43.51,34.535 42.493,33.518 ; v1(47,54) 47.5,54.5 51.559,54.5 R9.1 R7.1 51.692,58.065 51.89,58.263 50.977,58.263 50.382,58.858 C16.1 47.858,58.858 v1(47.75,58.75) ; C15.1 50.285,34.39 49.543,33.648 49.262,33.648 48.873,33.26 48.873,32.127 v1(49.5,31.5) 50.179,31.5 ; R8.1 R6.1 50.179,31.5 ; IC1.4 51.774,33.095 50.179,31.5 ; v1(54.5,69.75) 54.594,69.75 54.944,69.4 C45.1 ; v1(54.5,71.5) 56.014,71.5 R32.1 ; C9.1 76.5,31.95 v1(76.5,30.25)
  Top Layer w0.5: C10.1 v1(72.5,77)
  Top Layer w1.2: C28.2@26.85,55.9 v1(28.2,55.9)
  Top Layer w1.5: v1(19.4,49.4) 22.291,49.4 C29.2 ; C40.2@28.9,58.9 v1(30.2,58.9)
  other v1: 33.7,32.7 81,35.75 27,41.4 80,41.7 18.1,42 63,42.75 64,42.75 9.6,47.2 80,50.4 86.7,50.4 43,51.75 9.5,52.3 14.7,53.8 17.6,53.8 20.4,53.8 16.1,55.4 19,55.4 20.4,56.4 14.6,56.5 17.6,56.5 16.1,57.8 19,57.9 14.6,59.5 17.6,59.5 20.5,59.5 9.4,61.5 1.75,65.75 9.3,68.4 9.2,73.1 81.25,73.25
  other v2: 62.75,37.25 63,41.25 64,41.25 62.25,63.75 62.25,65.25 64,66.943 62.75,67.5
"In +": R1.4 R14.2 TP9.1 | length 12.6
  Top Layer w0.254: R14.2 45.475,36.476 45.823,36.128 46.223,36.128 v1@46.551,35.801 ; v1(46.601,35.75) 46.964,35.387 46.964,26.161 47.8,25.325 R1.4
"In -": R1.3 R15.2 TP10.1 | length 19.1
  Top Layer w0.254: R15.2 45.625,38.5 v1(48,38.5) ; v1@48.101,38.35 48.25,38.201 48.25,29.275 52.2,25.325 R1.3
  Bottom Layer w0.254: TP10.1 47.482,38.518 47.982,38.518 v1(48,38.5)
NetC2_1: C2.1 IC1.6 M2.1 M2.2 M2.3 M4.5-6-7-8 P2.1 TP5.1 | length 7.5
  Top Layer w0.254: IC1.6 59.76,34.365 60.7,33.425 C2.1 ; v1(62.25,34.75) 62.25,34.675 C2.1 ; M2.1 63.373,32.905 63.25,33.028 63.25,33.25 63.075,33.425 C2.1
  other v1: 65.5,36.2 66.4,36.2 67.3,36.2 68.2,36.2 65.5,37.1 66.4,37.1 67.3,37.1 68.2,37.1 65.5,38 66.4,38 67.3,38 68.2,38 65.5,38.9 66.4,38.9 67.3,38.9 68.2,38.9 65.5,39.8 66.4,39.8 67.3,39.8 68.2,39.8
NetC2_2: C2.2 D1.1 IC1.8 | length 9.5
  Top Layer w0.254: D1.1 55.649,38.6 55.798,38.749 55.798,39.21 55.99,39.402 57.01,39.402 57.443,38.969 57.443,37.307 57.647,37.103 58.314,37.103 IC1.8 59.656,36.905 60.349,36.212 60.349,36.126 60.7,35.775 C2.2
NetC12_1: C12.1 C13.2 C14.2 C17.2 C18.2 IC2.6 M1.1 M1.2 M1.3 M3.5-6-7-8 TP6.1 | length 8.2
  Top Layer w0.254: IC2.6 58.827,59.533 59.867,58.493 C12.1 C12.1@60.467,58.493 ; v1(61.5,59.5) 61.474,59.5 C12.1@60.467,58.493 ; M1.1 63.225,58.905 63.102,58.782 63.102,58.602 62.993,58.493 C12.1@60.467,58.493
  Bottom Layer w0.254: TP6.1@61.276,59.276 v1(61.5,59.5)
  other v1: 65.5,62.2 66.4,62.2 67.3,62.2 68.2,62.2 65.5,63.1 66.4,63.1 67.3,63.1 68.2,63.1 65.5,64 66.4,64 67.3,64 68.2,64 65.5,64.9 66.4,64.9 67.3,64.9 68.2,64.9 65.5,65.8 66.4,65.8 67.3,65.8 68.2,65.8
NetC12_2: C12.2 D2.1 IC2.8 | length 7.9
  Top Layer w0.254: D2.1 54.067,63.668 54.315,63.42 54.315,63.17 55.412,62.073 IC2.8 58.116,62.073 58.768,61.421 58.768,61.082 59.008,60.843 C12.2
NetC13_1: C13.1 C14.1 C17.1 C18.1 P2.2
NetC19_1: C19.1 C20.2 IC3.1 R15.1 | length 4.9
  Top Layer w0.254: IC3.1 40.567,40.05 C20.2 42,39.94 C19.1 42.09,38.35 R15.1
NetC19_2: C19.2 C21.2 IC3.8 R14.1 | length 5
  Top Layer w0.254: IC3.8 40.443,34.75 C21.2 42,34.86 C19.2 42.09,36.55 R14.1
NetC25_2: C25.2 R16.1 R17.2 | length 3.6
  Top Layer w0.254: R17.2 37,44.173 37.348,43.825 R16.1 37.665,43.56 C25.2
NetC27_1: C27.1 IC4.4 R19.1 R29.1 | length 12
  Top Layer w0.254: R19.1 41.152,43.825 41.5,44.173 IC4.4 43.715,45.3 43.88,45.135 44.309,45.135 45.5,46.326 45.5,47.377 44.877,48 42.803,48 42.383,48.42 42.383,48.462 41.81,49.035 C27.1
NetD3_1: D3.1 IC1.7 R4.2 TP2.1 | length 13.8
  Top Layer w0.254: v1(55.5,33.75) 55.5,32.9 56.5,31.9 D3.1 58.074,31.65 R4.2 58.474,31.501 56.25,33.725 56.25,35.486 56.399,35.635 IC1.7
  Bottom Layer w0.254: TP2.1@55.5,33.344 55.721,33.123 55.873,33.123 55.873,33.377 v1(55.5,33.75) TP2.1@55.5,33.344
NetD3_2: D3.2 R2.2 | length 3.8
  Top Layer w0.254: D3.2 56.669,28.519 57.923,28.519 R2.2@58.474,29.07 ; R2.2 R2.2@58.474,29.07 ; R2.2@58.474,29.07 58.474,29.251 58.858,29.635 58.858,29.454 R2.2@58.474,29.07
NetD4_1: D4.1 IC2.7 R5.2 TP1.1 | length 9
  Top Layer w0.254: R5.2 57.191,56.818 D4.1 55.667,57.068 55.419,57.316 55.169,57.316 54.5,57.984 v1(54.5,59.25) 54.75,59.25 56.303,60.803 IC2.7
NetD4_2: D4.2 R3.2 | length 2.4
  Top Layer w0.254: D4.2 55.667,53.768 56.067,54.168 R3.2
NetD5_1: D5.1 IC1.5 R12.2 TP7.1 | length 20.3
  Top Layer w0.254: v1(56.25,37) 56.316,37.066 56.316,38.266 D5.1 ; v1(57,34.25) 57,34.17 58.075,33.095 IC1.5 ; v1(60.25,42.75) 61,42.75 61.389,42.361 61.389,41.337 R12.2
  Bottom Layer w0.254: TP7.1 59,34.25 v1(57,34.25) 57,36.25 v1(56.25,37) 56.25,38.75 v1(60.25,42.75)
NetD5_2: D5.2 R10.2 | length 8.1
  Top Layer w0.254: D5.2 57.256,41.75 57.458,41.952 57.458,42.254 57.66,42.456 59.287,42.456 60.131,41.612 60.131,40.146 61.526,38.751 R10.2
NetD6_1: D6.1 IC2.5 R13.2 TP8.1 | length 13.1
  Top Layer w0.254: v1(54.5,65) 55.364,65 55.708,64.656 55.708,63.559 D6.1 57.491,63.518 R13.2 ; v1(56.25,58.75) 56.539,58.461 57.481,58.461 IC2.5
  Bottom Layer w0.254: TP8.1@54.688,65 55.25,64.437 55.25,62.75 56.25,61.75 v1(56.25,58.75)
NetD6_2: D6.2 R11.2 | length 2.5
  Top Layer w0.254: D6.2 55.667,66.568 56.367,65.868 R11.2
NetIC4_3: IC4.3 R17.1 | length 3.2
  Top Layer w0.254: R17.1 37.25,47.225 38.106,46.369 38.106,45.855 38.488,45.473 38.927,45.473 IC4.3
NetLED1_1: LED1.1 R21.1 | length 2.8
  Top Layer w0.254: LED1.1 R21.1
NetM1_4: M1.4 R3.1 R5.1 | length 5.3
  Top Layer w0.254: R5.1 R3.1 62.298,54.168 63.225,55.095 M1.4
NetM2_4: M2.4 R2.1 R4.1 | length 4.2
  Top Layer w0.254: R4.1 R2.1 61.621,29.095 M2.4
NetM3_4: M3.4 R11.1 R13.1 | length 5.7
  Top Layer w0.254: R11.1 R13.1 60.693,63.417 61.244,62.866 61.495,62.866 62.265,62.095 M3.4
NetM4_4: M4.4 R10.1 R12.1 | length 8.8
  Top Layer w0.254: R12.1 R10.1 58.474,38.249 59.025,37.698 60.259,37.698 60.713,37.244 61.25,37.244 62.399,36.095 M4.4
"Op-Amp Out": C27.2 IC4.1 R18.2 R29.2 | length 8.9
  Top Layer w0.254: R18.2 R18.2@38.75,49.075 ; IC4.1 39.1,48.725 R18.2@38.75,49.075 ; R29.2 42.888,46.921 42.548,47.261 42.548,47.541 41.977,48.111 41.114,48.111 40.19,49.035 C27.2 40.015,49.075 R18.2@38.75,49.075
P+: C1.2 FL1.2 P1.2
P-: C1.1 FL1.4 P1.1
PWM_A: IC1.2 J2.10 R6.2 TP3.1 | length 68.4
  Top Layer w0.254: v1(51.75,36.75) 51.816,36.684 51.816,36.469 52.65,35.635 IC1.2 53.525,35.635 54.475,34.685 R6.2
  Bottom Layer w0.254: J2.10 34.327,72.397 34.327,67.464 34.263,67.4 34.263,55.538 34.325,55.476 32.173,53.325 32.173,49.407 43.83,37.75 49.816,37.75 50.066,38 50.5,38 v1(51.75,36.75) 52.75,35.75 TP3.1
PWM_B: IC2.2 J2.9 R7.2 TP4.1 | length 36.3
  Top Layer w0.254: v1(50.75,61.75) 50.87,61.75 51.817,60.803 IC2.2 52.692,60.803 53.642,59.853 R7.2
  Bottom Layer w0.254: J2.9 38.028,78.638 39.031,78.638 39.98,79.587 40.88,79.587 45.815,74.652 45.815,71.125 50.75,66.19 v1(50.75,61.75) 51.5,61 TP4.1
PWM_EN: IC1.3 IC2.3 J2.8 R8.2 R9.2 | length 108.9
  Top Layer w0.254: J2.8 34.298,77.448 v1(34.298,75.75) v1(39.5,75.75) ; v1(48,60) 48.329,59.671 50.991,59.671 51.129,59.533 IC2.3 ; v1(49.5,33) 50.747,33 51.637,33.89 51.637,34.058 51.944,34.365 IC1.3 ; v1@50.25,30.25 v1(50.25,30.106) 50.25,29.963 51.715,28.498 53.473,28.498 54.475,29.5 R8.2 ; v1(50.25,53.75) 50.734,53.266 52.64,53.266 53.642,54.268 R9.2
  Bottom Layer w0.254: v1(34.298,75.75) 33.708,74.708 31.719,72.719 31.719,48.781 45.577,34.923 47.577,34.923 v1(49.5,33) 50.25,32.25 v1(50.25,30.106) ; v1(39.5,75.75) 39.5,75.387 48.127,66.76 48.127,63.49 48,63.363 v1(48,60) 50.25,57.75 v1(50.25,53.75)
"Vin -": C3.1 C4.1 C5.1 C6.1 C7.1 C9.2 C10.2 M1.5-6-7-8 M2.5-6-7-8 R1.2 R31.2 | length 13.5
  Top Layer w0.3: R31.2 65.25,73 v1(66,72.25)
  Top Layer w1.5: C3.1 69.345,72.8 C10.2
  other v1: 67.25,22.25 67.25,23.5 67.25,24.75 71,28.25 72,28.25 73.25,28.25 74.25,28.25 65.5,29.2 66.4,29.2 67.3,29.2 68.2,29.2 65.5,30.1 66.4,30.1 67.3,30.1 68.2,30.1 65.5,31 66.4,31 67.3,31 68.2,31 65.5,31.9 66.4,31.9 67.3,31.9 68.2,31.9 65.5,32.8 66.4,32.8 67.3,32.8 68.2,32.8 70.75,33.25 72,33.25 73.25,33.25 74.25,33.25 65.5,53.75 67,53.75 68.5,53.75 70,54 65.5,55.2 66.4,55.2 67.3,55.2 68.2,55.2 70.25,55.5 65.5,56.1 66.4,56.1 67.3,56.1 68.2,56.1 65.5,57 66.4,57 67.3,57 68.2,57 70.25,57 65.5,57.9 66.4,57.9 67.3,57.9 68.2,57.9 70.25,58.5 65.5,58.8 66.4,58.8 67.3,58.8 68.2,58.8 69.75,60 67.5,72.25 69.25,72.25 66,75.5 69.25,75.5
"Vin ADC": C45.2 C47.2 J2.3 R31.1 R32.2 | length 43.3
  Top Layer w0.254: C47.2 22.65,75.625 22.65,76.7 ; J2.3@22.788,78.638 J2.3 22.65,76.7 ; v1(23.7,76.6) 22.75,76.6 22.65,76.7 ; v1(28.5,76.1) 32.034,76.1 33.134,75 54.275,75 55.677,73.598 55.927,73.598 56.275,73.25 R31.1 56.275,72.75 56.623,72.402 57.101,72.402 57.35,72.153 57.35,72.136 57.599,71.887 57.677,71.887 58.225,71.339 R32.2 58.225,69.634 C45.2
  Bottom Layer w0.254: v1(23.7,76.6) 24.2,76.1 v1(28.5,76.1)
pads on no net: IC3.3 IC3.4 IC3.7 J1.1 J1.2 J1.3 J1.4 J1.5 J1.6 J1.7 J1.10 J2.2 J2.5 J2.6 J2.7 M5.1 M6.1 M7.1 M8.1

## Polygon pours and split planes (outlines as drawn)
5V on Top Layer "5V_L01_P029" (solid, remove dead copper, pour order 29): 22.2,61.5 27.8,61.5 27.8,57.3 22.2,57.3
P+ on Top Layer "P+_L01_P026" (solid, remove dead copper, pour order 26): 17.5,37.5 23.75,37.5 23.75,29 17.5,29
GND on Top Layer "GND_L01_P014" (solid, remove dead copper, pour order 14): 64.5,36.75 64.5,43.5 62,43.5 62,36.75
NetC12_1 on Top Layer "NETC12_1_L01_P011" (solid, remove dead copper, pour order 11): 62.5,55.75 64.75,55.75 64.75,59.75 67.25,59.75 69.25,61.75 69.25,64.5 65.25,64.5 64,63.25 64,61.5 62.5,61.5
GND on Top Layer "GND_L01_P013" (solid, remove dead copper, pour order 13): 62,63.25 62.389,62.861 64,62.861 64,63.75 64.5,64.25 64.5,68 62,68
NetC2_1 on Top Layer "NETC2_1_L01_P010" (solid, remove dead copper, pour order 10): 62.75,29.75 64.75,29.75 64.75,33.5 66.75,33.5 69,35.75 68.5,36.25 64,36.25 64,35.25 62.75,34
NetC12_1 on Top Layer "NETC12_1_L01_P009" (solid, remove dead copper, pour order 9): 65,66.5 70.5,66.5 70.5,69.25 72.5,71.25 74.75,71.25 74.75,53.75 71.75,53.75 71.5,54 71.5,60.25 70.5,61.25 65,61.25
"Vin -" on Top Layer "VIN_-_L01_P008" (solid, remove dead copper, pour order 8): 65,76.25 70.5,76.25 70.5,70.25 65,70.25
"Vin -" on Top Layer "VIN_-_L01_P007" (solid, remove dead copper, pour order 7): 65,60.25 70.5,60.25 70.5,53.25 65,53.25
"Vin -" on Top Layer "VIN_-_L01_P006" (solid, remove dead copper, pour order 6): 65,33.75 75,33.75 75,25 71.25,25 71.25,22.5 61.5,22.5 61.5,24.25 65,27.75
NetC2_1 on Top Layer "NETC2_1_L01_P005" (solid, remove dead copper, pour order 5): 88.75,46.25 88.75,39.25 71.25,39.25 71.25,35 64.75,35 64.75,46.25
NetC13_1 on Top Layer "NETC13_1_L01_P004" (solid, remove dead copper, pour order 4): 82,71.25 82,47.5 70.25,47.5 70.25,53.25 75.5,53.25 75.5,71.25
"Vin -" on Top Layer "VIN_-_L01_P002" (solid, remove dead copper, pour order 2): 50.25,23.25 55.25,23.25 55.25,16.25 55.5,16 61.5,16 61.5,22.5 71.25,22.5 71.25,18.75 80,18.75 80,7.5 50.25,7.5
"DCDC Input Unfiltered" on Top Layer "DCDC_INPUT_UNFILTERED_L01_P001" (solid, remove dead copper, pour order 1): 20,25 42.5,25 42.5,23.25 49.5,23.25 49.5,6.25 30,6.25 30,13.75 20,13.75
P+ on Top Layer "P+_L01_P000" (solid, remove dead copper, pour order 0): 1.25,37.5 17.5,37.5 17.5,15 1.25,15
GND on Bottom Layer "GND_L04_P025" (solid, remove dead copper, pour order 25): 0,80 59.75,80 59.75,68.25 53.25,68.25 53.25,68.19 50.81,65.75 48.5,65.75 48.5,28 40,28 40,0 0,0
GND on Bottom Layer "GND_L04_P027" (solid, remove dead copper, pour order 27): 81,54 93.25,54 93.25,37.5 81,37.5
GND on Bottom Layer "GND_L04_P024" (solid, remove dead copper, pour order 24): 43.75,0 82,0 82,80 60,80 60,68 53.5,68 51,65.5 48.75,65.5 48.75,57.75 49.75,56.75 49.75,54.75 48.75,53.75 48.75,27.5 43.75,27.5
"Vin -" on Bottom Layer "VIN_-_L04_P012" (solid, remove dead copper, pour order 12): 65,76.25 75,76.25 75,27.5 69.25,27.5 69.25,52.5 65,52.5 65,60.75 71.25,60.75 71.25,68.75 65,68.75
P- on Bottom Layer "P-_L04_P003" (solid, remove dead copper, pour order 3): 0,45 12.5,45 12.5,26.25 16.25,26.25 16.25,0 0,0
5V on Ground 2 (split plane): 59.898,79.49 59.898,68.102 53.5,68.102 53.461,68.094 53.428,68.072 50.942,65.586 48.766,65.586 48.727,65.578 48.694,65.556 48.678,65.54 48.656,65.507 48.648,65.468 48.648,57.75 48.656,57.711 48.678,57.678 49.648,56.708 49.648,54.792 48.678,53.822 48.656,53.789 48.648,53.75 48.648,33.791 48.628,33.762 48.621,33.723 48.628,33.684 48.65,33.65 48.684,33.628 48.723,33.621 52.148,33.621 52.148,28.042 51.708,27.602 43.25,27.602 43.211,27.594 43.178,27.572 43.156,27.539 43.148,27.5 43.148,23.25 43.148,0.51 0.51,0.51 0.51,79.49
GND on Ground 2 (split plane): 23.148,36.602 14.102,36.602 14.102,42.148 23.148,42.148
GND on Ground 2 (split plane): 81.49,79.49 81.49,54.045 81.499,53.945 81.528,53.849 81.576,53.761 81.639,53.684 81.684,53.639 81.761,53.576 81.849,53.528 81.945,53.499 82.045,53.49 92.74,53.49 92.74,38.01 82,38.01 81.9,38.001 81.805,37.972 81.716,37.924 81.639,37.861 81.576,37.784 81.528,37.695 81.499,37.6 81.49,37.5 81.49,0.51 43.352,0.51 43.352,23.25 43.352,27.398 51.75,27.398 51.789,27.406 51.822,27.428 52.322,27.928 52.344,27.961 52.352,28 52.352,51.25 52.344,51.289 52.322,51.322 51.102,52.542 51.102,65.406 51.111,65.412 51.133,65.445 51.141,65.484 51.139,65.495 53.542,67.898 60,67.898 60.039,67.906 60.072,67.928 60.094,67.961 60.102,68 60.102,79.49
12V on Ground 2 (split plane): 50.898,52.5 50.906,52.461 50.928,52.428 52.148,51.208 52.148,33.824 48.852,33.824 48.852,53.708 49.822,54.678 49.844,54.711 49.852,54.75 49.852,56.75 49.844,56.789 49.822,56.822 48.852,57.792 48.852,65.382 50.898,65.382
"Vin -" on Ground 2 (split plane): 70.398,62.75 70.398,33.75 70.398,18.352 61.602,18.352 61.602,24.208 65.072,27.678 65.094,27.711 65.102,27.75 65.102,76.148 70.398,76.148
GND on Ground 1 (split plane): 59.898,79.49 59.898,68.102 53.5,68.102 53.461,68.094 53.428,68.072 50.928,65.572 50.906,65.539 50.898,65.5 50.898,52.5 50.906,52.461 50.928,52.428 52.148,51.208 52.148,28.042 51.708,27.602 43.25,27.602 43.211,27.594 43.178,27.572 43.156,27.539 43.148,27.5 43.148,5.102 40.25,5.102 40.211,5.094 40.178,5.072 40.156,5.039 40.148,5 40.156,4.961 40.178,4.928 40.211,4.906 40.25,4.898 43.25,4.898 43.289,4.906 43.322,4.928 43.344,4.961 43.352,5 43.352,27.398 51.75,27.398 51.789,27.406 51.822,27.428 52.322,27.928 52.344,27.961 52.352,28 52.352,51.25 52.344,51.289 52.322,51.322 51.102,52.542 51.102,65.458 53.542,67.898 60,67.898 60.039,67.906 60.072,67.928 60.094,67.961 60.102,68 60.102,79.49 81.49,79.49 81.49,54.045 81.499,53.945 81.528,53.849 81.576,53.761 81.639,53.684 81.684,53.639 81.761,53.576 81.849,53.528 81.945,53.499 82.045,53.49 92.74,53.49 92.74,38.01 82,38.01 81.9,38.001 81.805,37.972 81.716,37.924 81.639,37.861 81.576,37.784 81.528,37.695 81.499,37.6 81.49,37.5 81.49,0.51 43.352,0.51 43.352,2 43.344,2.039 43.322,2.072 43.289,2.094 43.25,2.102 40.25,2.102 40.211,2.094 40.178,2.072 40.156,2.039 40.148,2 40.156,1.961 40.178,1.928 40.211,1.906 40.25,1.898 43.148,1.898 43.148,0.51 0.51,0.51 0.51,79.49

## Other copper
Ground 1 (plane layer: these items are gaps in the copper):
  lines w0.2: 40.25,2 43.25,2 43.25,0 ; 40.25,5 40.5,5 43.25,5 43.25,27.5 51.75,27.5 52.25,28 52.25,51.25 51,52.5 51,65.5 53.5,68 60,68 60,80
Ground 2 (plane layer: these items are gaps in the copper):
  lines w0.2: 43.25,0 43.25,23.25 43.25,27.5 51.75,27.5 52.25,28 52.25,51.25 51,52.5 51,65.5 53.5,68 60,68 60,80 ; 48.723,33.723 52.223,33.723 ; 48.75,33.75 48.75,53.75 49.75,54.75 49.75,56.75 48.75,57.75 48.75,65.468 48.766,65.484 51.039,65.484 ; 14,36.5 14,42.25 23.25,42.25 23.25,36.5 14,36.5 ; 61.5,18.25 61.5,24.25 65,27.75 65,76.25 65.5,76.25 70.5,76.25 70.5,62.75 70.5,33.75 70.5,18.25 61.5,18.25

## Silkscreen, mask and mechanical layers (free items; w line width, h text height)
Top Overlay:
  text "GND" at 13.834,78.1 h0.3
  text "Vin" at 16.402,76.4 h0.3
  text "Current" at 25.417,76.4 h0.3
  text "PWM B" at 38.2,73.817 h0.5 r90
  text "PWM_EN" at 35.7,73.384 h0.5 r90
  text "PWM A" at 40.8,73.167 h0.5 r90
  text "TinyPICO" at 40.8,68.067 h0.5 r90
  text "Micro-USB Face Here" at 42.9,67.288 h0.5 r90
  text "5V" at 34.675,65.1 h0.5
  text "GND" at 37.134,65 h0.5
Bottom Overlay:
  text "To WPT Coil" at 76.8,41.3 h1 r270
  text "GND" at 5.4,40 h1 r270
  text "+ve" at 16.9,32.3 h1 r270
  text "Input from Power Source" at 2.883,28.9 h0.7 r270
  text "WPT Round 2 TX" at 23.05,2.45 h1
  text "AE" at 17.6,0.65 h1
Board Layout:
  lines w0.2: 82,20 82,37.5 ; 82,20 82,0 0,0 0,80 82,80 82,60 82,54 93.25,54 93.25,37.5 82,37.5 ; 82,20 82,20 ; 82,37.5 82,37.5

## Text inside footprints (layer, text, board x,y; h text height)
C3: Top Overlay "+" at 70.816,73.629 h0.3
J1: Top Overlay "1" at 17.38,64.96 h0.3; Top Overlay "10" at 40.1,65 h0.3
J2: Top Overlay "1" at 17.5,76 h0.3; Top Overlay "10" at 40.2,76.4 h0.3